# EAGLE board Protocell_module (EAGLE 7.1.0)
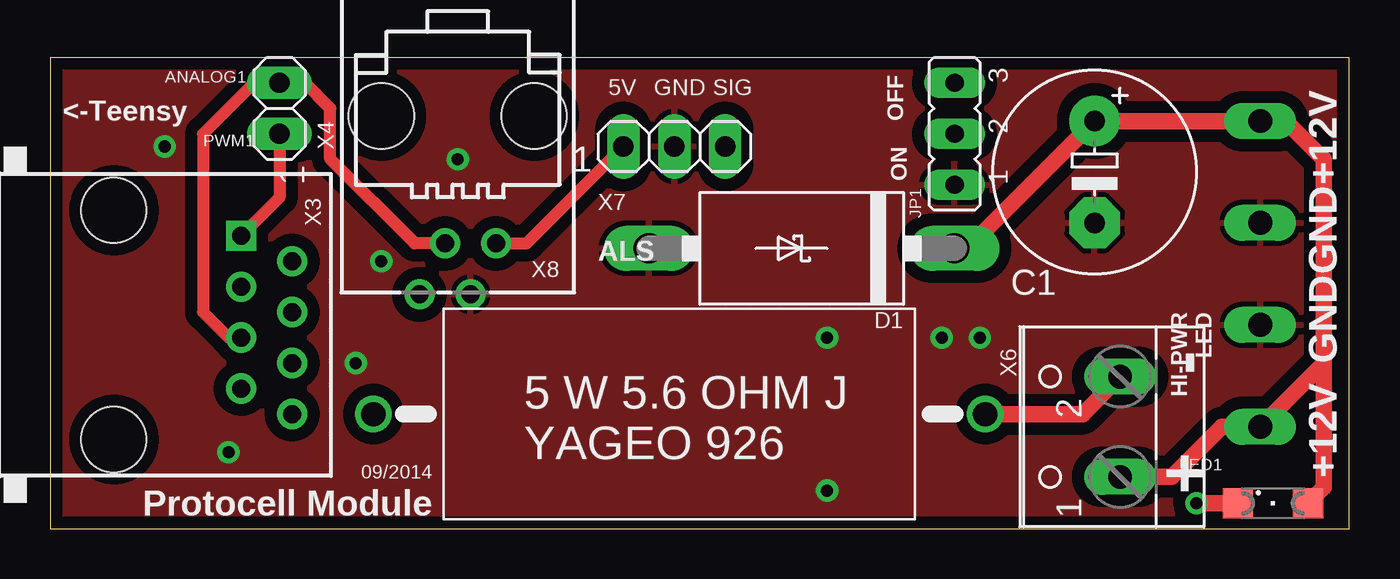
[diagram p0: board, top side]
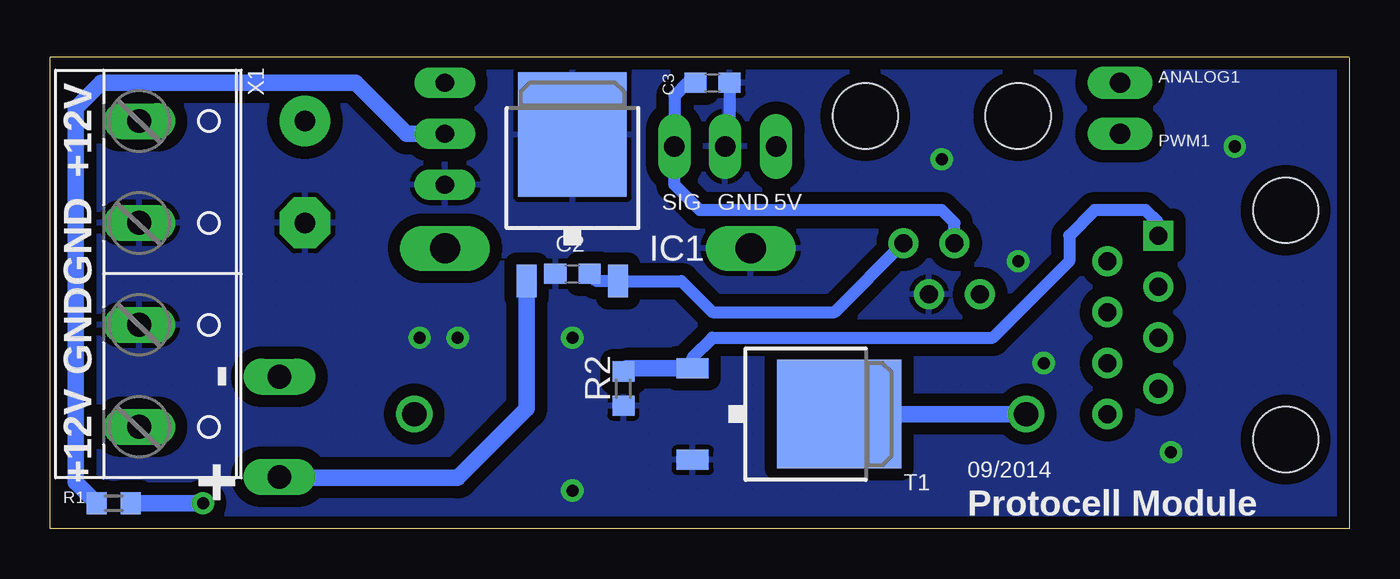
[diagram p1: board, bottom side, seen from below]

Size 64.77 x 23.5 mm. Coordinates in mm from the lower left corner, seen from the top.
Outline: 0,23.48 0,0 64.77,0 64.77,23.5 0,23.5
Copper layers (1*16): Top 0.035mm / dielectric 1.5mm / Bottom 0.035mm
Design rules "SparkFun": minimum track width 8mil, minimum drill 20mil, track to track 8mil, track to pad 8mil, pad to pad 8mil, via to via 8mil, smd to smd 8mil, copper to edge 10mil, drill to drill 8mil, minimum pad ring 12mil, minimum via ring 10mil, stop-mask expansion 4mil, vias tented up to drill 25mil, thermal gap 10mil

## Footprints (pad centres in the part's own frame; a part is rotated, then mirrored left to right if it is on the bottom)
E5-10,5 = drill 1.016 pad 2.54: + -2.54,0 | drill 1.016 pad 2.54 octagon: - 2.54,0
C0603 = smd 1.1 x 1: 1 -0.85,0; 2 0.85,0
DO201T15 = drill 1.499 long: A 7.62,0; C -7.62,0
DPACK_3 = smd 1 x 1.6: 1 -2.28,-4.8; 3 2.28,-4.8 | smd 5.4 x 6.2: 4 0,2.5
JP2 = drill 0.914 long: 1 -2.54,0; 2 0,0; 3 2.54,0
SML1206 = smd 1.5 x 1.5: A 1.75,0; C -1.75,0
R0603 = smd 1 x 1.1: 1 -0.85,0; 2 0.85,0
YAGEO_SQP500JB = drill 1.2: 1 -15,0; 2 15.5,0
DPACK = smd 1 x 1.6: 1 -2.28,-4.8; 3 2.28,-4.8 | smd 5.4 x 6.2: 2 0,2.5
W237-4P = drill 1.194 long: 1 -7.62,-0.635; 2 -2.54,-0.635; 3 2.54,-0.635; 4 7.62,-0.635
RJ45-NO-SHIELD = drill 0.9 pad 1.4 square: 1 -4.445,6.35 | drill 0.9 pad 1.4: 2 -3.175,8.89; 3 -1.905,6.35; 4 -0.635,8.89; 5 0.635,6.35; 6 1.905,8.89; 7 3.175,6.35; 8 4.445,8.89 | hole 3.251: -5.715,0; 5.715,0
1X02 = drill 1.016 long: 1 -1.27,0; 2 1.27,0
W237-102 = drill 1.194 long: 1 -2.5,-1.27; 2 2.5,-1.27
1X03 = drill 1.016 long: 1 -2.54,0; 2 0,0; 3 2.54,0
558872-1 = drill 0.889: 1 -1.905,5.461; 2 -0.635,8.001; 3 0.635,5.461; 4 1.905,8.001 | hole 3.251: -3.81,-0.889; 3.81,-0.889

## Placement (x,y rotation side)
C1  470uF  [E5-10,5]  52.07,17.78 270 top
C2  1uF  [C0603]  38.73,12.7 180 bottom
C3  1uF  [C0603]  31.75,22.23 0 bottom
D1  SB540E-G  [DO201T15]  37.47,13.97 180 top
IC1  MC7805BDTRKG  [DPACK_3]  38.73,17.14 0 bottom
JP1  [JP2]  45.09,19.68 90 top
LED1  [SML1206]  60.96,1.27 0 top
R1  470  [R0603]  61.59,1.27 0 bottom
R2  4.7k  [R0603]  36.2,6.99 90 bottom
R3  5.6  [YAGEO_SQP500JB]  31.11,5.71 0 top
T1  [DPACK]  27.94,5.71 270 bottom
X1  [W237-4P]  59.69,12.7 270 bottom
X3  RJ45-8X  [RJ45-NO-SHIELD]  3.17,10.16 270 top
X4  [1X02]  11.43,20.95 90 top
X6  [W237-102]  52.07,5.08 90 top
X7  [1X03]  31.11,19.05 0 top
X8  [558872-1]  20.32,19.68 180 top

## Library data of the parts
C1-C3 = rcl
D1 IC1 R1-R3 T1 X4 X7 = CBLA_Test_bed_Library
JP1 = jumper
LED1 = led
X1 = con-wago-508; OC_FARNELL: unknown; OC_NEWARK: unknown
X3 = CBLA_Test_bed_Library; MPN: RJ45-8X; OC_FARNELL: unknown; OC_NEWARK: 16R6101
X6 = con-wago-500; MPN: 237-102; OC_FARNELL: unknown; OC_NEWARK: 70K9898
X8 = CBLA_Test_bed_Library; MF: TYCO ELECTRONICS; MPN: 5558872-1; OC_FARNELL: 1557674; OC_NEWARK: 42K7312

## Nets
+5V: C2.1 IC1.3 X7.1 X8.1
+12V: C1.+ D1.C IC1.1 LED1.A X1.1 X1.4 X6.1
ANALOG1: C3.1 X3.5 X4.2 X7.3 X8.3
GND: C1.- C2.2 C3.2 D1.A IC1.4 JP1.1 R2.1 T1.3 X1.2 X1.3 X7.2 X8.2
N$1: R3.1 T1.2
N$3: R3.2 X6.2
N$10: LED1.C R1.2
PWM1: R2.2 T1.1 X3.1 X4.1
PWR_LED_GND: JP1.2 R1.1

## Tracks (layer width: path | path; a pad name or v marks a point on that pad's centre or on a via)
+5V
  Top 0.61: X8.1 23.75,14.22 X7.1
  Bottom 0.61: C2.1 37.53,12.35 IC1.3 33.3,12.35 31.75,10.79 25.65,10.79 X8.1
+12V
  Top 0.813: 63.5,8.26 63.5,18.41 61.59,20.32 X1.1 C1.+ 45.72,13.97 D1.C | 63.5,8.26 X1.4 58.42,5.08 55.92,2.58 X6.1 | LED1.A 63.5,2.06 63.5,8.26
  Bottom 0.813: IC1.1 41.02,5.97 44.45,2.54 53.3,2.54 X6.1
ANALOG1
  Top 0.61: X3.5 8.89,9.53 7.62,10.79 7.62,19.68 10.16,22.23 X4.2 12.7,22.23 13.97,20.95 13.97,18.41 18.16,14.22 X8.3
  Bottom 0.61: C3.1 33.02,22.23 33.66,21.59 X7.3 33.66,17.14 32.38,15.88 20.32,15.88 19.68,15.24 X8.3
GND  (via drill 0.6)
  Bottom 0.61: C3.2 30.9,19.27 X7.2
  other vias: 38.73,1.91 46.35,9.53 8.89,3.81 15.24,8.26 44.45,9.53 38.73,9.53 16.51,13.34 20.32,18.41 5.71,19.05
  pour Top (isolate 0.61, hatched): 0,23.5 0,0 64.77,0 64.77,23.5
  pour Bottom (isolate 0.61, hatched): 0,23.5 0,0 64.77,0 64.77,23.5
N$1
  Bottom 0.813: R3.1 T1.2
N$3
  Top 0.813: R3.2 51.48,5.71 X6.2
N$10  (via drill 0.6)
  Top 0.813: LED1.C v57.15,1.27
  Bottom 0.813: v57.15,1.27 R1.2
PWM1
  Top 0.61: X4.1 11.43,16.51 X3.1
  Bottom 0.61: T1.1 32.74,8.54 31.75,9.53 17.78,9.53 13.97,13.34 13.97,14.61 12.7,15.88 10.16,15.88 9.53,15.24 X3.1
  Bottom 0.813: T1.1 36.03,8 R2.2
PWR_LED_GND
  Bottom 0.813: JP1.2 46.99,19.68 49.53,22.23 62.23,22.23 63.5,20.95 63.5,2.33 R1.1

## Text on the board
tPlace: ANALOG1 | 5V | GND | SIG | <-Teensy | OFF | PWM1 | ON | +12V | ALS | GND | HI-PWR / LED | - | GND | + | 09/2014 | +12V | Protocell Module
bPlace: ANALOG1 | +12V | PWM1 | GND | 5V | GND | SIG | GND | - | +12V | 09/2014 | Protocell Module | +